# Altium PCB PCB_carte_actionneur_robot_1A.PcbDoc
Units mm, origin at the board's own origin, x right, y up, seen from the top; angles counter-clockwise.
Board outline 100 x 45 mm, 4 copper layers (Top Layer, Internal Plane 1, Internal Plane 2, Bottom Layer); 42 components, 32 nets, 126 pads, 8 vias.
Unrouted connection lines stored in the file: 1.
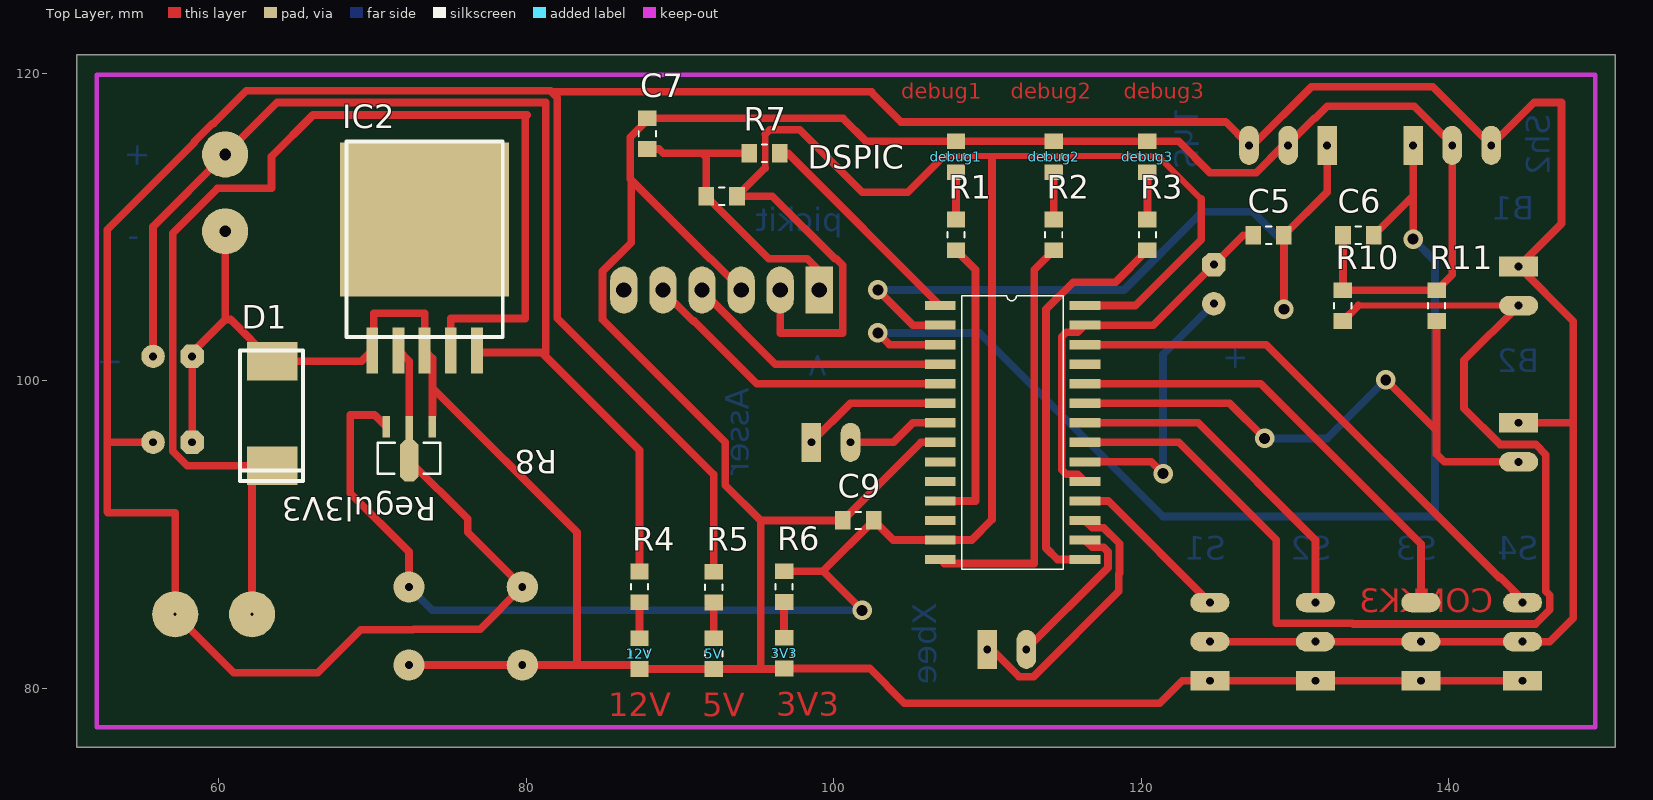
[diagram p0: Top Layer view]
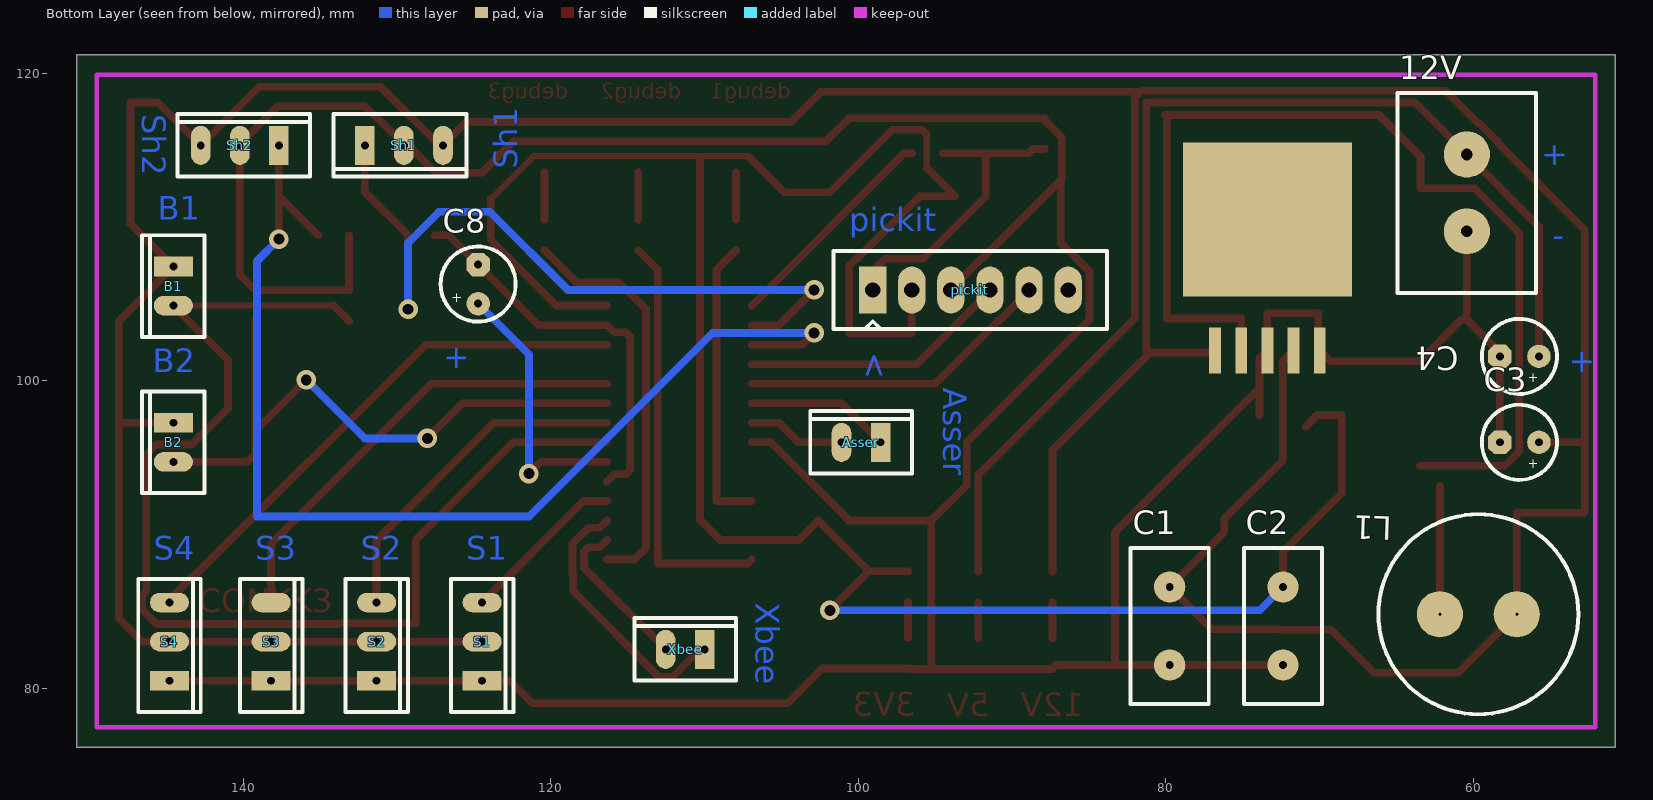
[diagram p1: Bottom Layer view, seen from below]
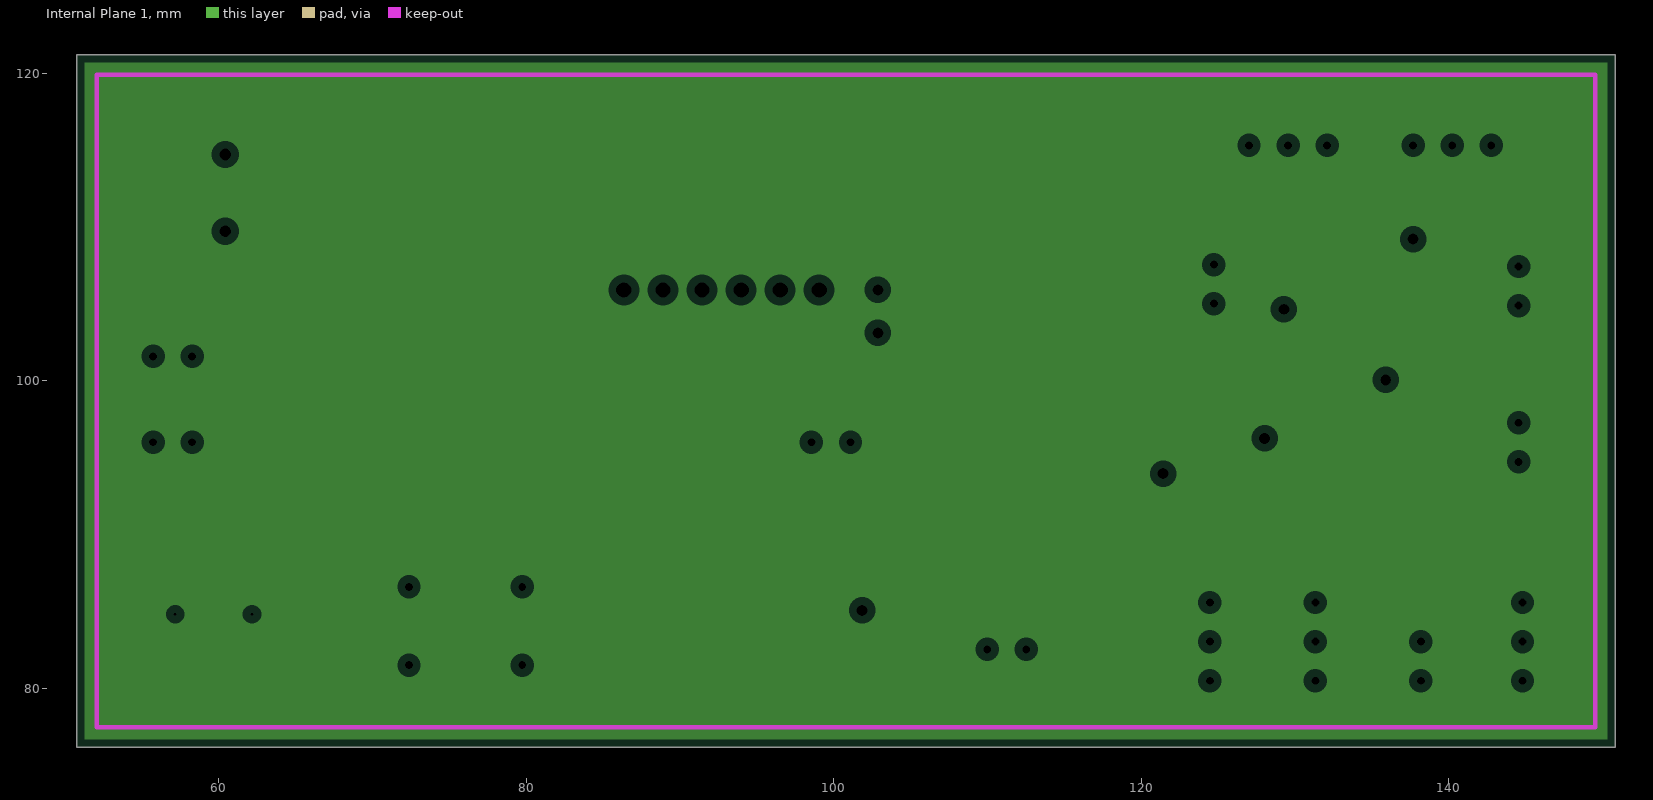
[diagram p2: Internal Plane 1, clearances drawn from the general rule]
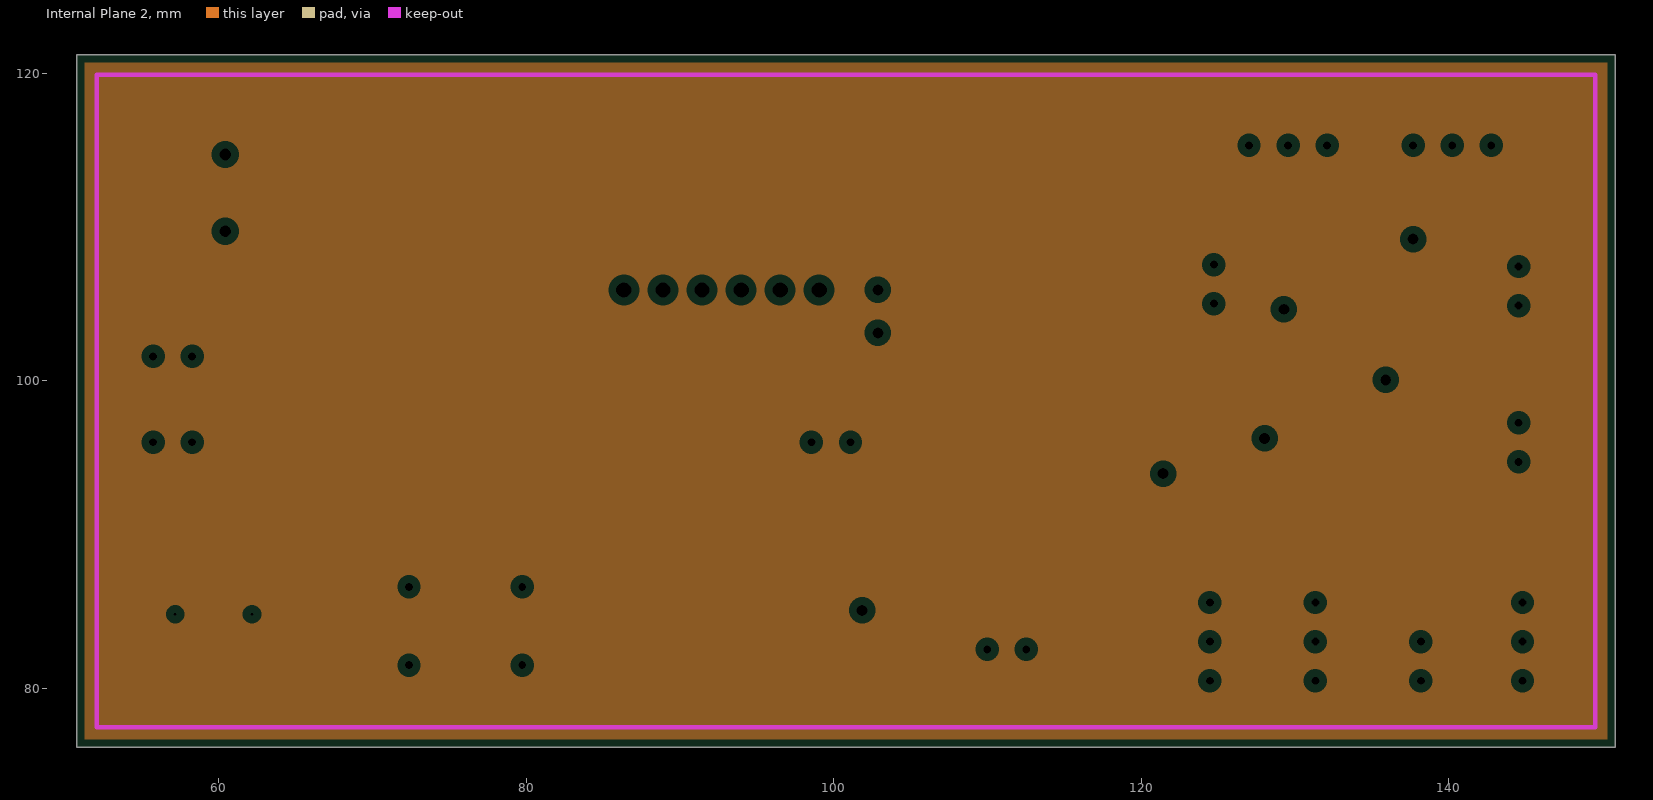
[diagram p3: Internal Plane 2, clearances drawn from the general rule]

## Layer stack, top to bottom
Top Layer: signal copper 0.0356
Dielectric: dielectric 0.32, FR-4, Dk 4.8
Internal Plane 1: plane copper 0.0356
Dielectric: dielectric 0.32, FR-4, Dk 4.8
Internal Plane 2: plane copper 0.0356
Dielectric: dielectric 0.32, FR-4, Dk 4.8
Bottom Layer: signal copper 0.0356

## Board outline
50.8,76.2 150.8,76.2 150.8,121.2 50.8,121.2

## Design rules (kind name [scope] priority, off if disabled: settings)
Clearance [All] p1: gap=0.25
MaximumViaCount [All] p1: limit=0
PlaneClearance [All] p1: clearance=0.508
PlaneConnect [All] p1: planeconnectstyle=Relief reliefexpansion=0.508 reliefentries=4 reliefconductorwidth=0.254 reliefairgap=0.254
PolygonConnect [All] p1: connectstyle=Relief reliefconductorwidth=0.254 reliefentries=4 polygonreliefangle="90 Angle" airgapwidth=0.254
RoutingVias [All] p1: holewidth=0.6 width=1 viastyle="Through Hole" minholewidth=0.711 minwidth=1.27 maxholewidth=0.711 maxwidth=1.27
SilkscreenOverComponentPads [All] p1: minsilkscreentomaskgap=0.254
SolderMaskExpansion [All] p1: expansion=0.102
Width [All] p1: maxlimit=0.5 minlimit=0.4 preferedwidth=0.4
25 further rules are at their usual default settings.

## Components (designator, comment, footprint, x,y, rotation, side; value= is the part's Value field where it differs from the comment)
3V3 "LED" cms805 96.774,82.312 r270 top (schematic designator LED3V3)
5V "LED" cms805 92.202,82.28 r270 top (schematic designator LED5V)
12V "LED" cms805 87.376,82.28 r270 top (schematic designator LED12V)
12V "Bornier" Bornier 59.436,114.728 r270 bottom
Asser "CONKK2" CONKK2 98.552,96.012 r0 bottom (schematic designator UARTAsser)
B1 "CONKK2" CONKK2 144.526,107.442 r270 bottom (schematic designator bumper1)
B2 "CONKK2" CONKK2 144.526,97.282 r270 bottom (schematic designator bumper2)
C1 "Cap2" CAPA2 79.756,86.614 r270 bottom
C2 "Cap2" CAPA2 72.39,81.534 r90 bottom
C3 "470uF" Capa_pol1 55.626,96.012 r0 bottom
C4 "470uF" Capa_pol1 55.626,101.6 r0 bottom
C5 "100nF" cms805 128.27,109.474 r0 top
C6 "100nF" cms805 134.112,109.474 r0 top
C7 "100nF" cms805 87.884,116.078 r270 top
C8 "10uF" Capa_pol1 124.714,104.902 r90 bottom
C9 "0.1uF" cms805 101.6,90.932 r180 top
D1 "Schottky B340" SMC 63.5,94.488 r90 top
debug1 "LED" cms805 107.95,114.579 r90 top (schematic designator LED1)
debug2 "LED" cms805 114.3,114.579 r90 top (schematic designator LED2)
debug3 "LED" cms805 120.396,114.579 r90 top (schematic designator LED3)
DSPIC "dsPIC33FJ128MC802" SOIC28(300mil) 106.934,104.902 r0 top
IC2 "TS2596" TO263-5L 73.406,110.49 r0 top
L1 "Inductance" self 59.69,84.836 r180 bottom
pickit "pickit3" pickit3 99.06,105.918 r180 bottom
R1 "240ohms" cms805 107.95,109.499 r90 top
R2 "240ohm" cms805 114.3,109.499 r90 top
R3 "240ohm" cms805 120.396,109.499 r90 top
R4 "750ohms" cms805 87.376,86.614 r270 top
R5 "240ohms" cms805 92.202,86.598 r270 top
R6 "130ohms" cms805 96.774,86.63 r270 top
R7 "470ohm" cms805 95.504,114.808 r180 top
R8 "10kohm" cms805 92.71,112.014 r180 top
R10 "2kohm" cms805 133.096,104.902 r270 top
R11 "2kohm" cms805 139.192,104.902 r270 top
Regul3V3 "MCP1700" SOT89 73.914,97.028 r180 top
S1 "CONKK3" CONKK3#1 124.46,80.518 r90 bottom (schematic designator Servo1)
S2 "CONKK3" CONKK3#1 131.318,80.518 r90 bottom (schematic designator Servo2)
S3 "CONKK3" CONKK3#2 138.176,80.518 r90 bottom (schematic designator Servo3)
S4 "CONKK3" CONKK3#1 144.78,80.518 r90 bottom (schematic designator Servo4)
Sh1 "CONKK3" CONKK3#1 132.08,115.316 r180 bottom (schematic designator Sharp1)
Sh2 "CONKK3" CONKK3#1 137.668,115.316 r0 bottom (schematic designator Sharp2)
Xbee "CONKK2" CONKK2 109.982,82.55 r0 bottom (schematic designator UARTXbee)

## Footprints (in the part's own frame and the unit in brackets; to place one, negate y for a bottom-side part, rotate by r counter-clockwise, add the part's x,y. Pads: shape width x height; smd on the part's side, far side on the other; paste and mask are expansions set on the pad)
Bornier [mm]
  round 3 hole 0.762: 1(0,-1) 2(5,-1)
  silkscreen extent -4,-5.5 9,3.5
CAPA2 [mil]
  round 80 hole 20: 1(0,0) 2(200,0)
  silkscreen extent -100,-100 300,100
Capa_pol1 [mil]
  round 60 hole 20: 1(5,0)
  oct 60x60 hole 20: 2(105,0)
  silkscreen extent -41,-96 151,96
cms805 [mm]
  rect 1.016x1.2 smd: 1(-1,0) 2(1,0)
  silkscreen extent -0.18,-0.56 0.18,0.56
CONKK2 [mil]
  rect 50x100 hole 20: 1(0,0)
  oval 50x100 hole 20: 2(100,0)
  silkscreen extent -80,-80 180,80
CONKK3#1 [mil]
  rect 50x100 hole 20: 1(0,0)
  oval 50x100 hole 20: 2(100,0) 3(200,0)
  silkscreen extent -80,-80 260,80
CONKK3#2 [mil]
  rect 50x100 hole 20: 1(0,0)
  oval 50x100 hole 20: 2(100,0)
  oval 50x100 all layers, no hole: 3(200,0)
  silkscreen extent -80,-80 260,80
pickit3 [mil]
  rect 70x120 hole 39.37: 1(0,0)
  oval 70x120 hole 39.37: 2(100,0) 3(200,0) 4(300,0) 5(400,0) 6(500,0)
  silkscreen extent -100,-100 600,100
self [mm]
  round 3 hole 0.2: 1(-2.5,0) 2(2.5,0)
  silkscreen extent -6.5,-6.5 6.5,6.5
SMC [mm]
  rect 2.5x3.3 smd: 1(6.8,0) 2(0,0)
  silkscreen extent -1,-2 7.5,2.1
SOIC28(300mil) [mm]
  rect 2x0.6 smd: 1(0,0) 2(0,-1.27) 3(0,-2.54) 4(0,-3.81) 5(0,-5.08) 6(0,-6.35) 7(0,-7.62) 8(0,-8.89) 9(0,-10.16) 10(0,-11.43) 11(0,-12.7) 12(0,-13.97) 13(0,-15.24) 14(0,-16.51) 15(9.4,-16.51) 16(9.4,-15.24) 17(9.4,-13.97) 18(9.4,-12.7) 19(9.4,-11.43) 20(9.4,-10.16) 21(9.4,-8.89) 22(9.4,-7.62) 23(9.4,-6.35) 24(9.4,-5.08) 25(9.4,-3.81) 26(9.4,-2.54) 27(9.4,-1.27) 28(9.4,0)
  silkscreen extent 1.39,-17.14 8,0.64
SOT89 [mm]
  rect 0.48x1.4 smd: 1(0,0) 3(3,0)
  oct 1.2x2.7 smd: 2(1.5,2.2)
  rect 0.48x2 smd: 2(1.5,0.3)
  silkscreen extent -0.51,1.04 3.56,3.05
TO263-5L [mm]
  rect 11x10 all layers, no hole: 0(0,0)
  rect 0.77x3 all layers, no hole: 1(3.4,-8.5) 2(1.7,-8.5) 3(0,-8.5) 4(-1.7,-8.5) 5(-3.4,-8.5)
  silkscreen extent -5.08,-7.62 5.08,5.08

## Part data
12V: library part Bornier2
C1 C2: "Capacitor"
C3 C4 C8: library part "Capa Pol"
C5 C6 C7 C9: library part Capa
R1 R2 R3 R4 R5 R6 R7 R8 R10 R11: library part Resistance

## Via types
v1: diameter 1.27, hole 0.711, Top Layer to Bottom Layer, 8 vias

## Nets (pads, with @x,y where several pads share a name; then routed paths per layer and width w, separated by ;. In a path a pad name is that pad's centre, name@x,y a point inside that pad or via, vN(x,y) a via of type N, cw(c..) or ccw(c..) an arc to the next point about the centre after c; other vN are vias at no path point)
3.3V: C2.2 C9.1 DSPIC.13 DSPIC.28 pickit.2 R6.1 R8.1 Regul3V3.3 | length 157.5
  Top Layer w0.4: 95.546,113.85 95.546,115.594 95.546,116.036 ; 107.177,114.621 121.098,114.621 123.89,111.83
  Top Layer w0.5: Regul3V3.3 70.152,97.79 68.58,97.79 68.58,92.71 72.39,88.9 C2.2 ; 95.546,113.85 R8.1 96.013,112.014 100.085,107.942 100.156,107.942 100.584,107.514 100.584,103.124 96.52,103.124 pickit.2 ; 95.546,116.036 95.838,116.328 97.794,116.328 101.854,112.268 104.823,112.268 107.135,114.579 ; R6.1 99.298,87.63 ; v1(101.854,85.09) 99.314,87.63 99.298,87.63 ; 110.286,114.417 110.286,90.982 108.966,89.662 DSPIC.13 103.87,89.662 C9.1 99.298,87.63 ; DSPIC.28 119.608,104.902 123.89,109.184 123.89,111.83
  Bottom Layer w0.5: C2.2 73.914,85.09 v1(101.854,85.09)
5V: B1.1 B2.1 C1.1 C3.1 IC2.4 L1.2 R5.1 Regul3V3.2 S1.2 S2.2 S3.2 S4.2 Sh1.3 Sh2.3 | length 281.2
  Top Layer w0.5: C3.1 52.775,96.012 ; IC2.4 72.414,101.282 72.414,96.728 72.414,94.828 76.2,91.042 76.2,90.17 C1.1 77.012,83.87 72.694,83.87 72.644,83.82 69.26,83.82 66.466,81.026 61,81.026 L1.2 57.19,91.443 52.825,91.443 52.775,91.493 52.775,96.012 ; R5.1 92.202,93.918 82.03,104.09 82.03,118.421 81.641,118.81 ; 102.47,118.739 104.37,116.84 125.476,116.84 Sh1.3 127.254,115.316 131.064,119.126 138.938,119.126 Sh2.3 145.542,118.11 147.32,118.11 147.32,110.236 B1.1 148.082,103.886 148.082,97.282 ; 102.47,118.81 81.641,118.81 ; S1.2 S2.2 S3.2 S4.2 146.558,83.058 148.082,84.582 148.082,97.282 ; B2.1 148.082,97.282 ; 52.775,96.012 52.775,109.825 58.436,115.486 58.436,115.556 59.608,116.728 59.678,116.728 61.81,118.86 81.591,118.86 81.641,118.81
12V: 12V.1@60.436,114.728 C4.1 IC2.1 R4.1 | length 74.6
  Top Layer w0.5: C4.1@55.753,101.854 55.753,110.045 60.436,114.728 63.818,118.11 81.209,118.11 ; IC2.1 76.942,101.854 81.026,101.854 ; 81.28,118.11 81.28,101.854 81.026,101.854 ; R4.1 87.376,95.504 81.026,101.854
DEBUG1: DSPIC.11 R1.1 | length 19.1
  Top Layer w0.5: DSPIC.11 109.22,92.202 109.22,107.229 R1.1
DEBUG2: DSPIC.14 R2.1 | length 27.1
  Top Layer w0.5: DSPIC.14 107.188,88.138 113.03,88.138 113.03,107.229 R2.1
DEBUG3: DSPIC.15 R3.1 | length 26.5
  Top Layer w0.5: DSPIC.15 114.554,88.392 113.802,89.144 113.802,104.658 115.57,106.426 118.323,106.426 R3.1
GND: 3V3.2 5V.2 12V.2 C1.2 C2.1 C3.2 C4.2 C5.1 C6.1 C7.1 C8.2 C9.2 D1.1 debug1.2 debug2.2 debug3.2 DSPIC.8 DSPIC.19 DSPIC.27 IC2.3 IC2.5 pickit.3 R10.1 R11.1 Regul3V3.1 S1.1 S2.1 S3.1 S4.1 Sh1.2 Sh2.2 | length 301
  Top Layer w0.5: C3.2 C4.2 58.293,101.854 60.436,103.997 ; 12V.2@60.436,109.728 60.436,103.997 ; C2.1 C1.2 83.312,81.534 ; 73.914,97.79 73.914,99.568 ; 84.971,103.994 84.971,107.128 86.834,108.991 86.834,113.064 ; 85.021,103.994 85.021,103.944 92.952,96.013 92.952,93.23 95.25,90.932 ; C7.1@87.884,116.943 86.784,115.843 86.784,113.114 86.834,113.064 ; C7.1 100.6,117.078 102.099,115.579 debug1.2 debug2.2 debug3.2 122.428,115.579 124.461,113.546 127.47,113.546 129.24,115.316 Sh1.2 129.54,115.388 131.238,117.086 131.309,117.086 132.08,117.857 137.739,117.857 140.208,115.388 Sh2.2 140.208,106.918 R11.1 R10.1 133.112,105.918 C6.1 ; pickit.3 93.98,105.977 92.015,107.942 91.956,107.942 86.834,113.064 ; 3V3.2@96.742,81.28 95.25,81.28 ; 3V3.2 102.342,81.312 104.598,79.056 121.194,79.056 122.656,80.518 S1.1 S2.1 S3.1 S4.1 ; DSPIC.8 105.68,96.012 C9.2 95.25,90.932 ; DSPIC.19 115.864,93.942 115.127,93.942 114.834,94.235 114.834,102.869 115.127,103.162 115.864,103.162 DSPIC.27 120.777,103.632 C8.2 126.619,109.474 ; C5.1@126.873,109.474 C5.1 C5.1@127.526,109.474 ; 60.436,103.997 60.791,103.997 D1.1 69.304,101.288 IC2.5 70.104,102.088 70.104,104.394 73.406,104.394 IC2.3 73.914,101.482 73.914,99.568 ; 73.914,99.568 83.312,90.17 83.312,81.534 ; 83.312,81.534 87.122,81.534 87.376,81.28 5V.2 95.25,81.28 ; 95.25,81.28 95.25,90.932
HEATSINK: IC2.0
MCLR: C7.2 pickit.1 R7.2 R8.2 | length 20.2
  Top Layer w0.5: C7.2 88.646,115.078 88.916,114.808 91.44,114.808 ; R7.2 91.44,114.808 ; pickit.1 99.06,107.172 98.29,107.942 95.782,107.942 R8.2 91.71,114.538 91.44,114.808
Netbumper1_2: B1.2 DSPIC.21 R10.2 | length 75.4
  Top Layer w0.4: 134.096,104.902 B1.2
  Top Layer w0.5: DSPIC.21 122.428,96.012 128.766,89.674 128.766,84.246 133.718,84.246 133.768,84.196 145.618,84.196 146.55,85.128 146.55,86.068 146.296,86.322 146.296,95.212 145.631,95.877 143.319,95.877 140.97,98.226 140.97,101.346 B1.2 ; R10.2 134.096,104.902
Netbumper2_2: B2.2 DSPIC.23 R11.2 | length 40.9
  Top Layer w0.5: DSPIC.23 125.73,98.552 v1(128.016,96.266) ; v1(135.89,100.076) 139.192,96.774 ; R11.2 139.192,96.774 ; B2.2 139.7,94.742 139.192,95.25 139.192,96.774
  Bottom Layer w0.5: v1(128.016,96.266) 132.08,96.266 v1(135.89,100.076)
NetC8_1: C8.1 DSPIC.20 | length 17.8
  Top Layer w0.5: DSPIC.20 120.65,94.742 v1(121.412,93.98)
  Bottom Layer w0.5: v1(121.412,93.98) 121.412,101.727 C8.1
NetD1_2: D1.2 IC2.2 L1.1 | length 77
  Top Layer w0.5: L1.1 62.19,93.178 ; D1.2 57.967,94.488 57.031,95.424 57.031,109.609 59.944,112.522 63.458,112.522 63.458,114.6 66.152,117.294 80.064,117.294 79.942,117.172 79.942,104.062 75.106,104.062 IC2.2
NetDSPIC_1: DSPIC.1 R7.1 | length 14.5
  Top Layer w0.5: R7.1 97.028,114.808 DSPIC.1
NetLED1_1: debug1.1 R1.2 | length 3.1
  Top Layer w0.5: R1.2 debug1.1
NetLED2_1: debug2.1 R2.2 | length 3.1
  Top Layer w0.5: R2.2 debug2.1
NetLED3_1: debug3.1 R3.2 | length 3.1
  Top Layer w0.5: R3.2 debug3.1
NetLED3V3_1: 3V3.1 R6.2 | length 2.3
  Top Layer w0.5: 3V3.1 R6.2
NetLED5V_1: 5V.1 R5.2 | length 2.3
  Top Layer w0.5: 5V.1 R5.2
NetLED12V_1: 12V.1@87.376,83.28 R4.2 | length 2.3
  Top Layer w0.5: 12V.1@87.376,83.28 R4.2
PGC: DSPIC.5 pickit.5 | length 20.6
  Top Layer w0.5: pickit.5 88.9,105.859 90.865,103.894 90.924,103.894 94.996,99.822 DSPIC.5
PGD: DSPIC.4 pickit.4 | length 17.5
  Top Layer w0.5: pickit.4@91.44,105.859 96.207,101.092 DSPIC.4 ; pickit.4 pickit.4@91.47,105.888
PWM1: DSPIC.18 S1.3 | length 10.9
  Top Layer w0.5: DSPIC.18 117.856,92.202 S1.3
PWM2: DSPIC.22 S2.3 | length 22.2
  Top Layer w0.5: DSPIC.22 123.698,97.282 131.318,89.662 S2.3
PWM3: DSPIC.24 S3.3 | length 30
  Top Layer w0.5: DSPIC.24 127.762,99.822 138.176,89.408 S3.3
PWM4: DSPIC.26 S4.3 | length 35.5
  Top Layer w0.5: DSPIC.26 128.119,102.362 143.253,87.228 143.323,87.228 144.78,85.771 S4.3
RXASSER: Asser.2 DSPIC.7 | length 6.4
  Top Layer w0.5: Asser.2 103.886,96.012 105.156,97.282 DSPIC.7
RXXBEE: DSPIC.16 Xbee.2 | length 10.4
  Top Layer w0.5: Xbee.2 117.834,87.862 117.834,88.899 117.541,89.192 116.804,89.192 DSPIC.16
SHARP1: C5.2 DSPIC.2 Sh1.1 | length 50.5
  Top Layer w0.5: v1(102.87,105.918) 105.156,103.632 DSPIC.2 ; v1(129.27,104.664) C5.2 132.08,112.284 Sh1.1
  Bottom Layer w0.5: v1(102.87,105.918) 118.872,105.918 123.952,110.998 127.254,110.998 129.27,108.982 v1(129.27,104.664)
SHARP2: C6.2 DSPIC.3 Sh2.1 | length 73.9
  Top Layer w0.5: v1(102.87,103.124) 103.632,102.362 DSPIC.3 ; C6.2 137.668,112.03 ; v1(137.668,109.22) 137.668,112.03 ; Sh2.1 137.668,112.03
  Bottom Layer w0.5: v1(102.87,103.124) 109.474,103.124 121.412,91.186 139.089,91.186 139.089,107.799 v1(137.668,109.22)
TXASSER: Asser.1 DSPIC.6 | length 9.4
  Top Layer w0.5: Asser.1 101.092,98.552 DSPIC.6
TXXBEE: DSPIC.17 Xbee.1 | length 17.6
  Top Layer w0.5: Xbee.1 110.282,82.55 112.052,80.78 112.992,80.78 118.534,86.322 118.534,87.451 118.584,87.501 118.584,89.419 117.541,90.462 116.804,90.462 DSPIC.17
pads on no net: DSPIC.9 DSPIC.10 DSPIC.12 DSPIC.25 pickit.6

## Polygon pours and split planes (outlines as drawn)
no net on Internal Plane 1 (split plane): 150.29,76.71 51.31,76.71 51.31,120.69 150.29,120.69
no net on Internal Plane 2 (split plane): 150.29,76.71 51.31,76.71 51.31,120.69 150.29,120.69

## Keep-outs
Keep-Out Layer:
  lines w0.3: 52.1,77.5 149.5,77.5 149.5,119.9 52.1,119.9 52.1,77.5

## Other copper
Bottom Layer:
  text "+" at 53.848,114.046 h1.52 r358.83
  text "-" at 54.102,108.712 h1.52 r0.05
  text "+" at 125.476,102.362 h1.52 r270
  text "+" at 52.324,102.108 h1.52 r270
  text "<" at 98.298,101.854 h1.52 r270

## Silkscreen, mask and mechanical layers (free items; w line width, h text height)
Drill Drawing:
  text ".LEGEND" at 22.768,45.212 h1.52
  text "Drill Drawing." at 22.768,42.672 h1.52

## Dimensions
52.1,77.5 to 149.5,77.5 on Mechanical 1
52.1,77.5 to 52.1,119.9 on Mechanical 1